# Altium PCB Flyback_PCB.PcbDoc
Units mil, origin at the board's own origin, x right, y up, seen from the top; angles counter-clockwise.
Board outline 3937.01 x 3937.01 mil, 2 copper layers (Top Layer, Bottom Layer); 52 components, 27 nets, 118 pads, 4 vias.
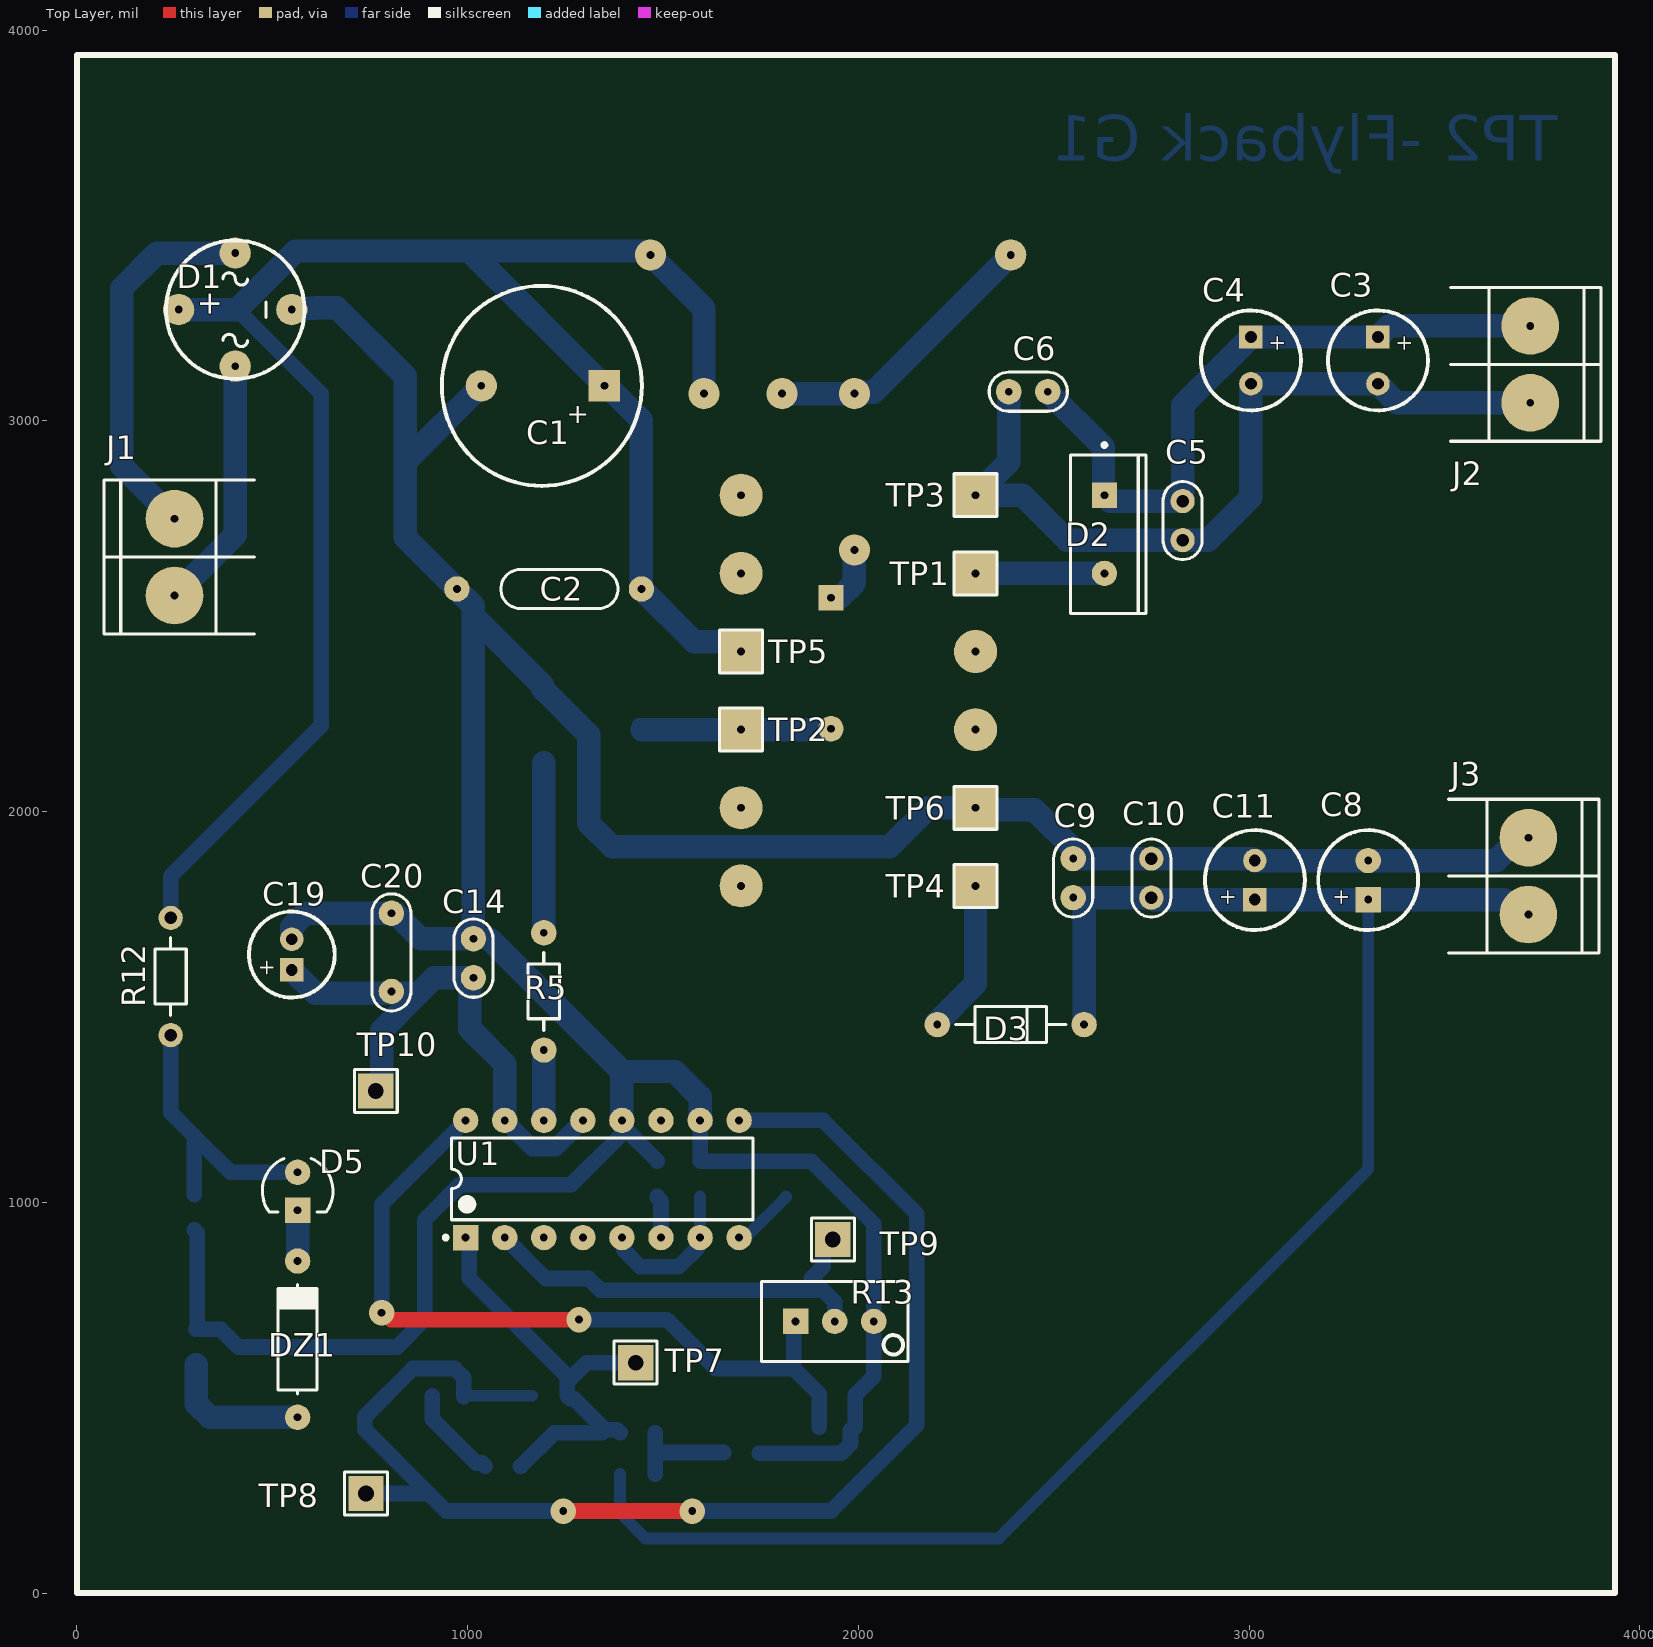
[diagram p0: Top Layer view]
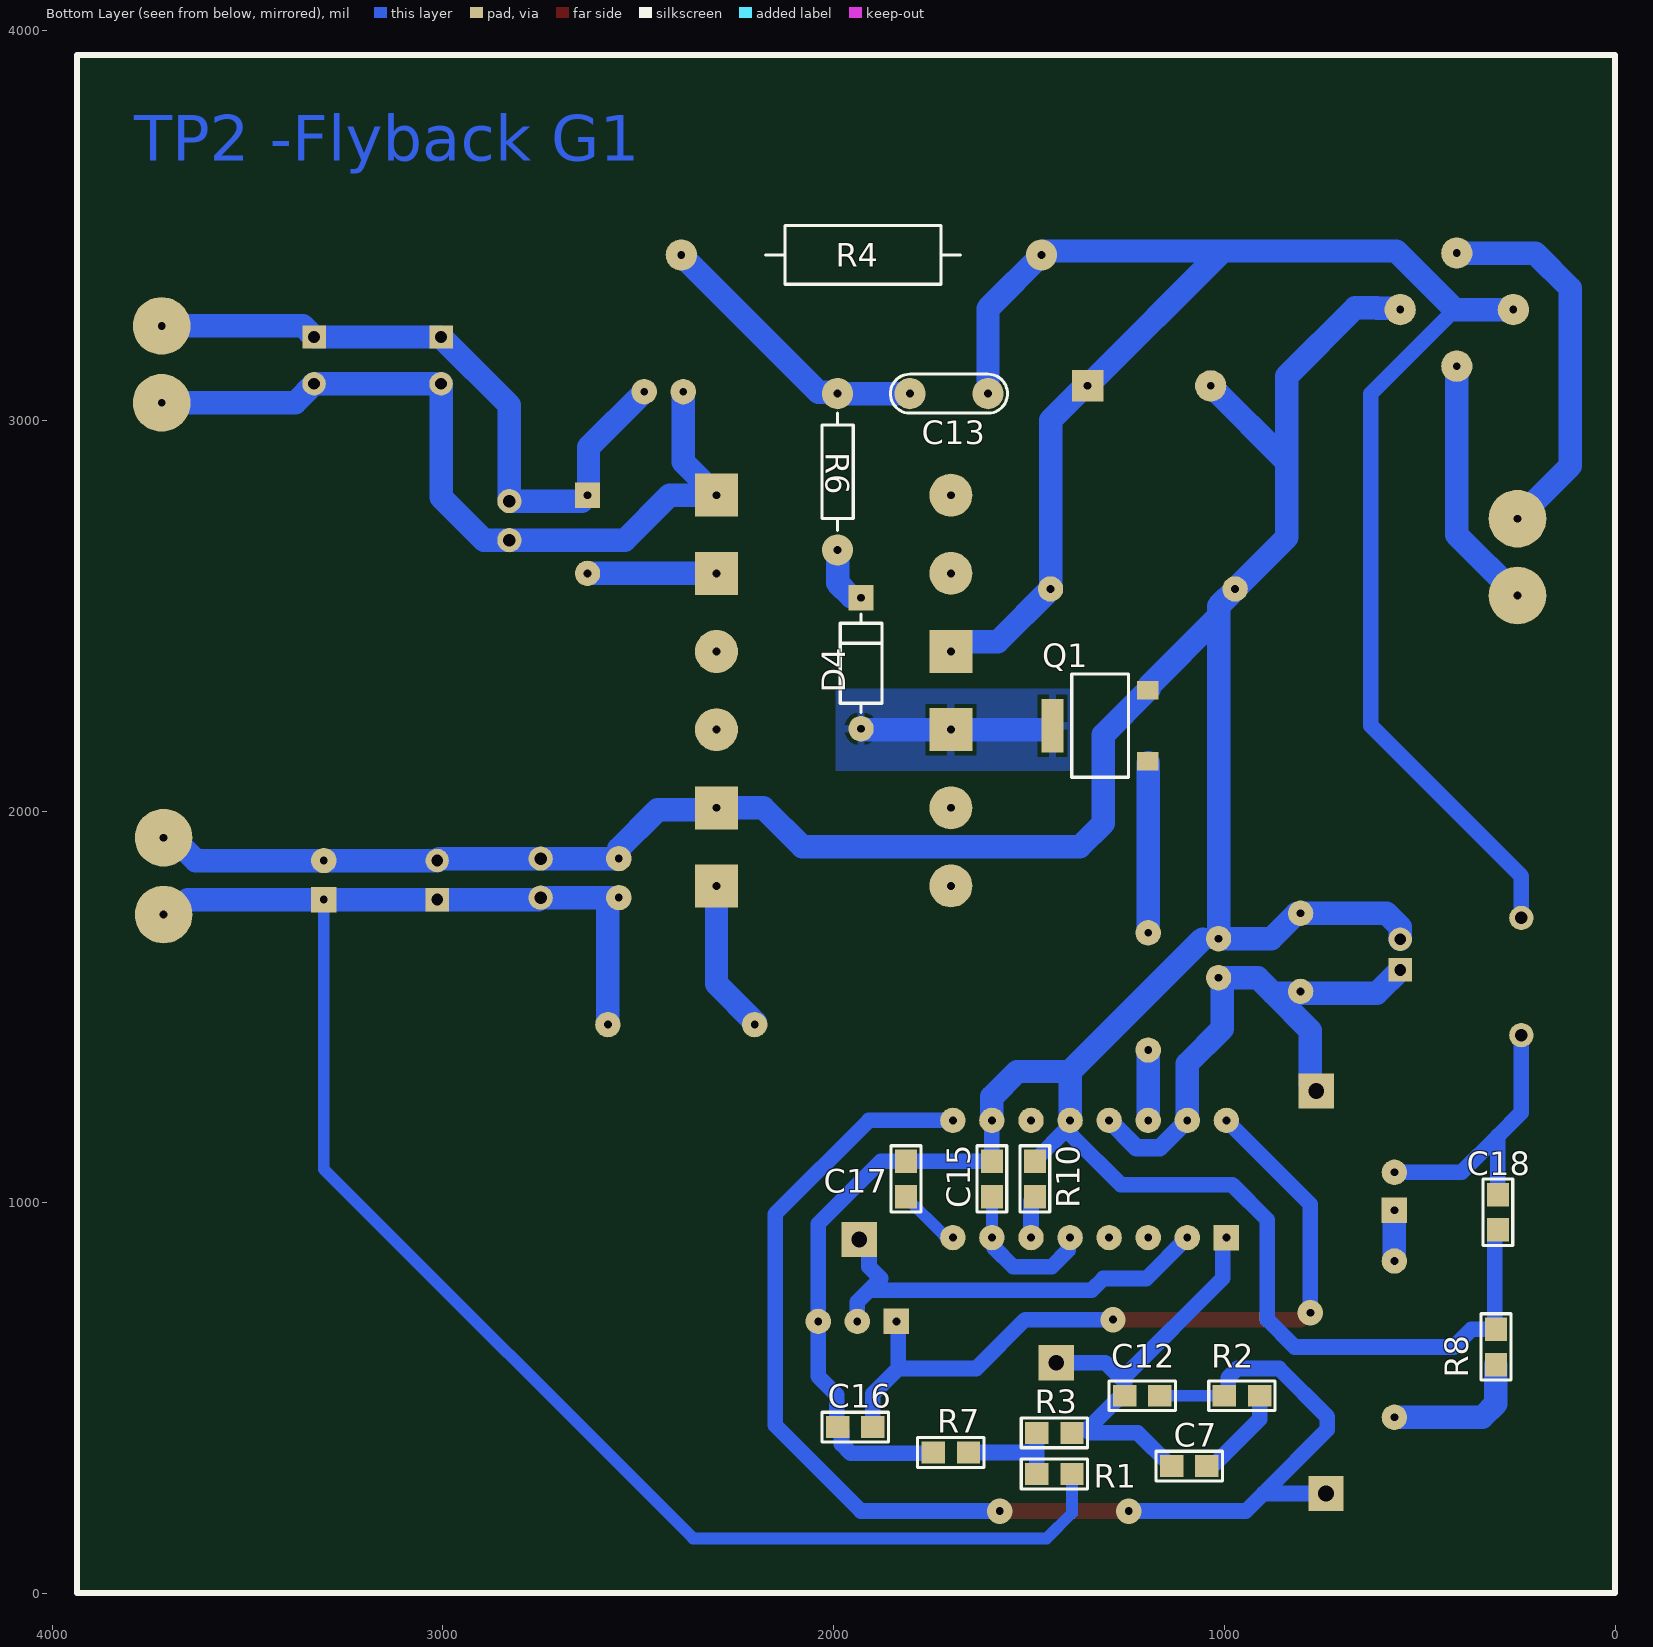
[diagram p1: Bottom Layer view, seen from below]
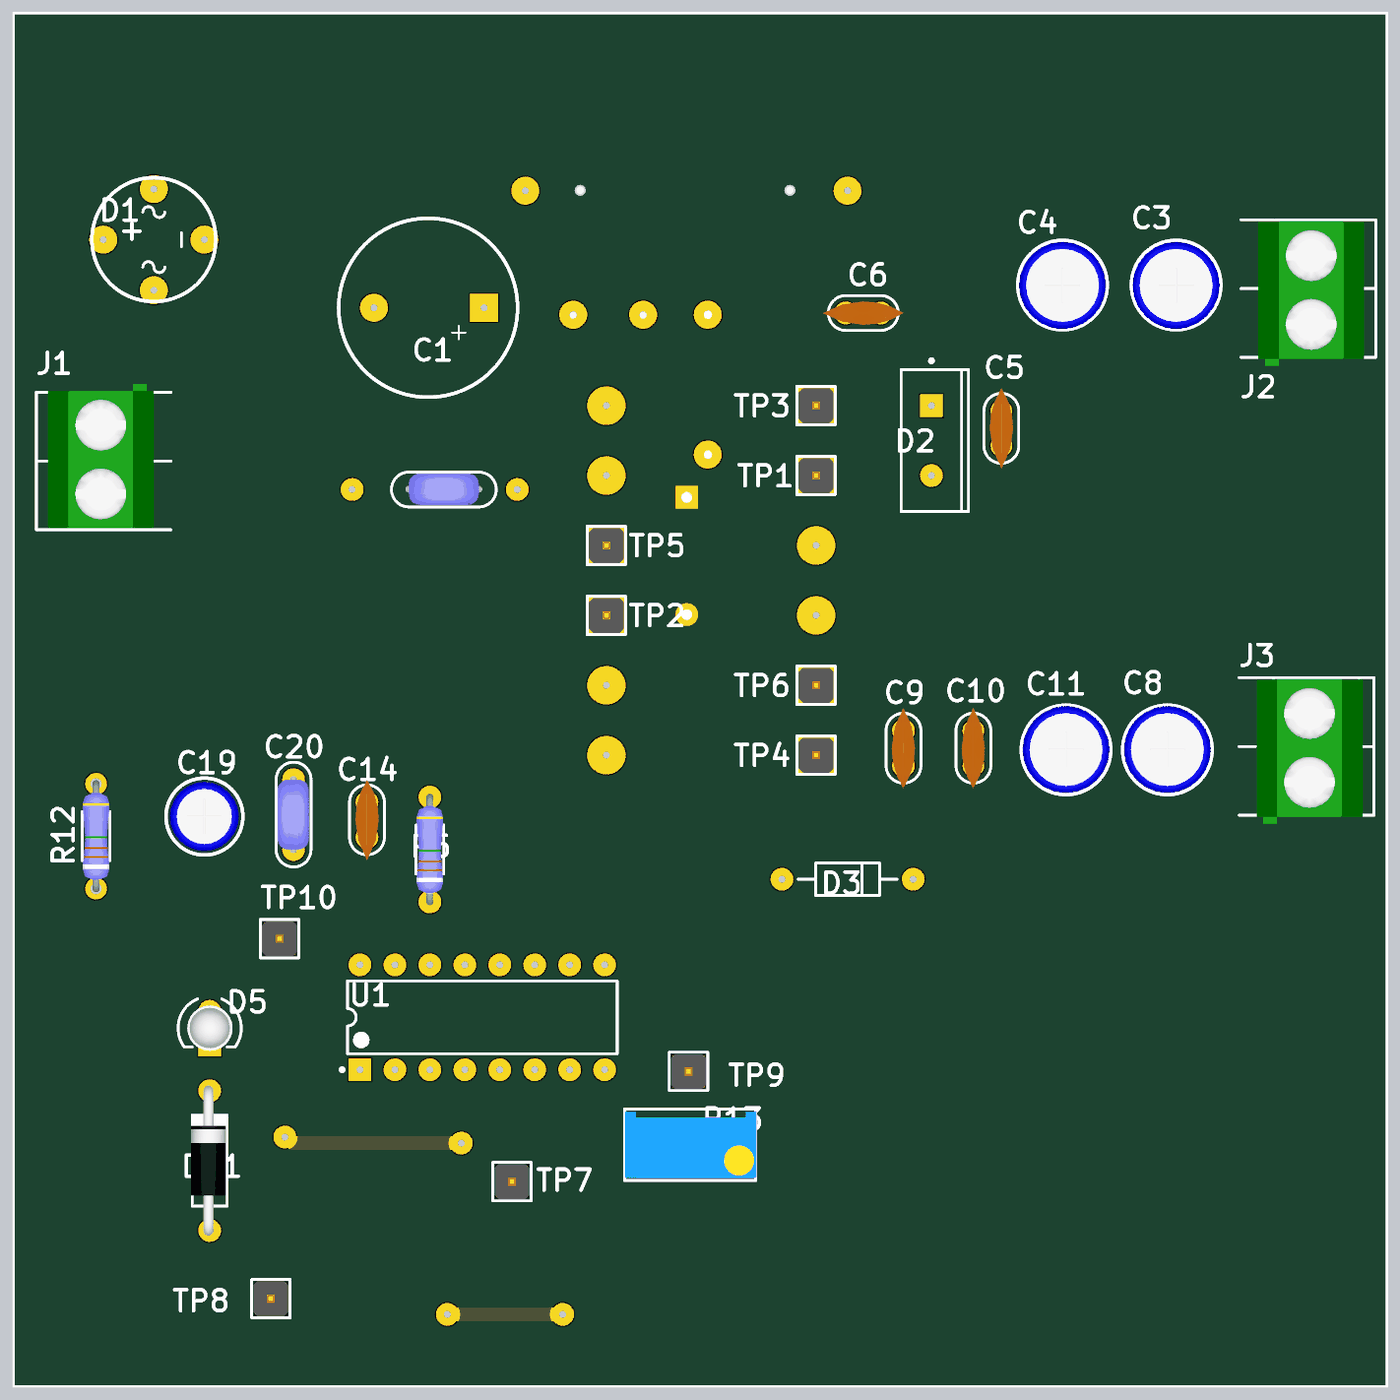
[diagram p2: 3D render of the assembled board from above, using the file's embedded part models]
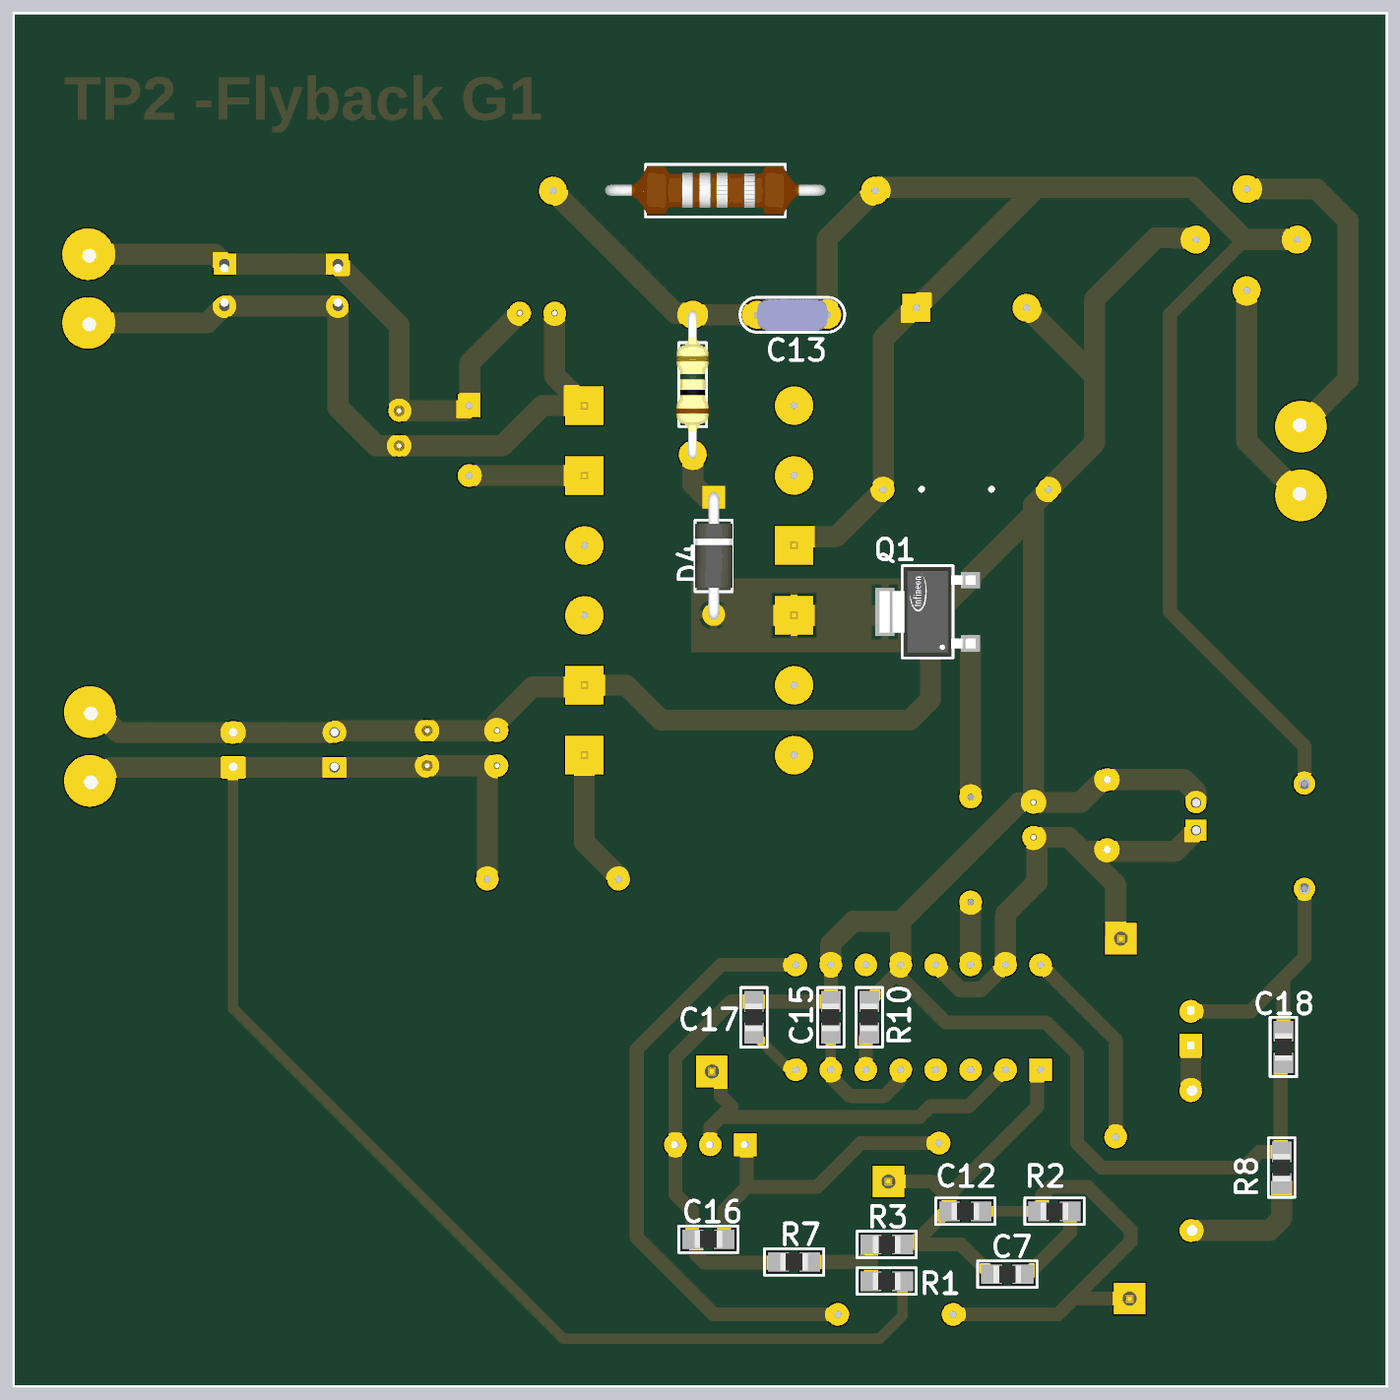
[diagram p3: 3D render of the assembled board from below, using the file's embedded part models]

## Layer stack, top to bottom
Top Solder: solder mask 0.4, Solder Resist, Dk 3.5
Top Layer: signal copper 1.4
Dielectric 1: dielectric 12.6, FR-4, Dk 4.8
Bottom Layer: signal copper 1.4
Bottom Solder: solder mask 0.4, Solder Resist, Dk 3.5

## Board outline
0,0 3937.01,0 3937.01,3937.01 0,3937.01

## Design rules (kind name [scope] priority, off if disabled: settings)
Clearance [All] p1: gap=10 ignorepadtopadclearanceinfootprint=FALSE except(0: Arc-Hole Track-Hole SMDPad-Hole THPad-Hole Via-Hole Fill-Hole Poly-Hole Region-Hole Text-Hole; 15: Arc-Fill Arc-Poly Arc-Region Track-Fill Track-Poly Track-Region SMDPad-Fill SMDPad-Poly SMDPad-Region THPad-Fill THPad-Poly THPad-Region Via-Fill Via-Poly Via-Region)
PlaneClearance [All] p1: clearance=40
PolygonConnect [All] p1: connectstyle=Relief reliefconductorwidth=20 reliefentries=4 polygonreliefangle="90 Angle" airgapwidth=10
RoutingVias [All] p1: holewidth=28 width=50 viastyle="Through Hole" minholewidth=28 minwidth=50 maxholewidth=28 maxwidth=50
SilkToSilkClearance [All] p1: silktosilkclearance=0
SilkToSolderMaskClearance [IsPad] p1: minsilkscreentomaskgap=0 clearancetoexposedcopper=TRUE
SolderMaskExpansion [All] p1: expansion=4 istentingtop=FALSE
Width [All] p1: maxlimit=60 minlimit=30 preferedwidth=40
27 further rules are at their usual default settings.

## Components (designator, comment, footprint, x,y, rotation, side; value= is the part's Value field where it differs from the comment)
C1 "47u - 400V" CAP200RP2 1190,3090 r180 top
C2 "100n - 600V" CAP200#1 1235,2570 r180 top
C3 "47u" CAP100RP2#1 3330,3155 r270 top
C4 "47u" CAP100RP2#1 3005,3155 r270 top
C5 "1u" CAP100#1 2830,2745 r270 top
C6 "100n" CAP100#2 2435,3075 r180 top
C7 "CAP" 0805 1090,325 r0 bottom
C8 "47u" CAP100RP2#2 3305,1825 r90 top
C9 "100n" CAP100#2 2550,1830 r90 top
C10 "1u" CAP100#1 2750,1830 r90 top
C11 "22u" CAP100RP2#3 3015,1825 r90 top
C12 "CAP" 0805 1210,505 r180 bottom
C13 "2.6n - 600V" CAP200#2 1705,3070 r180 bottom
C14 "100n" CAP100#2 1015,1625 r270 top
C15 "5.6n" 0805 1595,1060 r90 bottom
C16 "1n" 0805 1945,425 r180 bottom
C17 "1u" 0805 1815,1060 r90 bottom
C18 "100n" 0805 300,975 r90 bottom
C19 "10u" CAP100RP 550,1634.37 r90 top
C20 "1u" CAP200#3 805,1640 r270 top
D1 "PUENTE" "PUENTE - W10M" 260.48,3285 r90 top
D2 "MBR735" ONSC-TO-220-2-221B-04_E 2630,2710 r0 top
D3 "MUR110G" ONSC-AXIAL_LEAD-2-59-10_P 2390,1455 r180 top
D4 "1N4007E-E3/54" FP-1N4007E-E3-54-MFG 1930,2380 r270 bottom
D5 "LED" LED3 565,1029 r270 top
DZ1 "13V" DO41 565,650 r90 top
J1 "VAC" BORNERA2 250,2651.57 r0 top
J2 "BORNERA 2" BORNERA2 3720,3145 r180 top
J3 "BORNERA 2" BORNERA2 3715,1835 r180 top
Q1 "IPN80R1K4" FP-PG-SOT223-3-MFG 1317.95,2220 r0 bottom
R1 "39K" 0805 1435,305 r180 bottom
R2 "RES" 0805 955,505 r0 bottom
R3 "560" 0805 1435,410 r0 bottom
R4 "51K" RES600 2225,3425 r180 bottom
R5 "47" RES300#1 1195,1390 r90 top
R6 "120" RES400 1990,2670 r90 bottom
R7 "6.8K" 0805 1700,360 r0 bottom
R8 "1K" 0805 305,630 r90 bottom
R10 "1.2K" 0805 1485,1060 r90 bottom
R12 "100K - 2W" RES300#2 240,1428.07 r90 top
R13 "1K" "PRESET V" 1939.59,695.41 r0 top
TP1 "TP" TPTH#1 2300,2610 r0 top
TP2 "TP" TPTH#1 1700,2210 r0 top
TP3 "TP" TPTH#1 2300,2810 r0 top
TP4 "TP" TPTH#1 2300,1810 r0 top
TP5 "TP" TPTH#1 1700,2410 r0 top
TP6 "TP" TPTH#1 2300,2010 r0 top
TP7 "TP" TPTH#2 1430,590 r0 top
TP8 "TP" TPTH#2 740,255 r0 top
TP9 "TP" TPTH#2 1935,905 r0 top
TP10 "16VDC" TPTH#2 765,1285 r90 top
U1 "SG3525AN" ONSC-PDIP-16-648-08_T 1345,1060 r90 top

## Footprints (in the part's own frame and the unit in brackets; to place one, negate y for a bottom-side part, rotate by r counter-clockwise, add the part's x,y. Pads: shape width x height; smd on the part's side, far side on the other; paste and mask are expansions set on the pad)
0805 [mil] "Pasivo 0805"
  rect 60x56 smd: 1(-45,0) 2(45,0)
  silkscreen extent -85,-38 85,38, body extent -40,-24 39,25, height 15
BORNERA2 [mm] "Bornera con Tornillos 5mm separación"
  round 3.75 hole 0.508: 1(0,2.5) 2(0,-2.5)
  silkscreen extent -4.6,-5 5.2,5, body extent -3.76,-4.89 3.94,5.61, height 10
CAP100#1 [mil]
  round 62 hole 32: 1(-50,0) 2(50,0)
  silkscreen extent -100,-50 100,50, body extent -115,-33 115,34, height 241
CAP100#2 [mil]
  round 65 hole 20: 1(-50,0) 2(50,0)
  silkscreen extent -100,-50 100,50, body extent -115,-33 115,34, height 241
CAP100RP [mil] "Body diameter 5mm"
  rect 60x60 hole 30: 1(-39.37,0)
  round 60 hole 30: 2(39.37,0)
  silkscreen extent -110,-110 110,110, body extent -99,-99 99,100, height 454
CAP100RP2#1 [mil] "Body diameter 6.5mm"
  rect 60x60 hole 30: 1(-60,0)
  round 60 hole 30: 2(60,0)
  silkscreen extent -128,-128 128,128, body extent -124,-125 126,125, height 454
CAP100RP2#2 [mil] "Body diameter 6.5mm"
  rect 65x65 hole 20: 1(-50,0)
  round 65 hole 20: 2(50,0)
  silkscreen extent -128,-128 128,128, body extent -124,-125 126,125, height 454
CAP100RP2#3 [mil] "Body diameter 6.5mm"
  rect 60x60 hole 30: 1(-50,0)
  round 60 hole 30: 2(50,0)
  silkscreen extent -128,-128 128,128, body extent -124,-125 126,125, height 454
CAP200#1 [mil]
  round 65 hole 20: 1(-210,0) 2(262.44,0)
  silkscreen extent -150,-50 150,50, body extent -110,-46 110,44, height 246
CAP200#2 [mil]
  round 80 hole 20: 1(-100,0) 2(100,0)
  silkscreen extent -150,-50 150,50, body extent -110,-46 110,44, height 246
CAP200#3 [mil]
  round 65 hole 20: 1(-100,0) 2(100,0)
  silkscreen extent -150,-50 150,50, body extent -110,-46 110,44, height 246
CAP200RP2 [mil] "Body Diameter 12.5mm"
  rect 80x80 hole 20: 1(-160,0)
  round 80 hole 20: 2(154.96,0)
  silkscreen extent -256,-256 256,256, body extent -246,-245 244,246, height 787
DO41 [mil]
  round 65 hole 20: 1(-200,0) 2(200,0)
  silkscreen extent -140,-50 140,50, body extent -215,-47 215,54, height 80
FP-1N4007E-E3-54-MFG [mil]
  rect 65x65 hole 20 paste-99999 mask+0: 1(-167.72,0)
  round 65 hole 20 paste-99999 mask+0: 2(167.72,0)
  silkscreen extent -125,-53 125,53, body extent -183,-53 183,53, height 106
FP-PG-SOT223-3-MFG [mm]
  rect 1.4x1.2 smd paste+0 mask+0: 1(-3.1,2.3) 3(-3.1,-2.3)
  rect 1.4x3.5 smd paste+0 mask+0: 2(3.1,0)
  silkscreen extent -1.85,-3.35 1.85,3.35, body extent -3.5,-3.25 3.5,3.25, height 1.8
LED3 [mil]
  round 65 hole 20: 1(-48,0)
  rect 65x65 hole 20: 2(49,0)
  silkscreen extent -84,-90 54,90, body extent -65,-64 65,65, height 19
ONSC-AXIAL_LEAD-2-59-10_P [mil] "AXIAL, 2-Leads, Diameter 2.35mm"
  round 65 hole 20: 1(-187.8,0) 2(187.8,0)
  silkscreen extent -142,-46 142,46
ONSC-PDIP-16-648-08_T [mil] "DIP, 16-Leads, Body 19.55x6.85mm, Pitch 2.54mm"
  rect 65x65 hole 20: 1(-150,350)
  round 65 hole 20: 2(-150,250) 3(-150,150) 4(-150,50) 5(-150,-50) 6(-150,-150) 7(-150,-250) 8(-150,-350) 9(150,-350) 10(150,-250) 11(150,-150) 12(150,-50) 13(150,50) 14(150,150) 15(150,250) 16(150,350)
  silkscreen extent -155,-386 104,406, body extent -155,-385 155,385, height 175
ONSC-TO-220-2-221B-04_E [mil] "FM, 2-Leads, Body 10.3x4.85mm, Pitch 5.08mm"
  rect 65x65 hole 20: 1(0,100)
  round 65 hole 20: 3(0,-100)
  silkscreen extent -87,-203 106,233, body extent -86,-203 105,203, height 750
"PRESET V" [mil]
  rect 65x65 hole 20: 1(-100,0)
  round 65 hole 20: 2(0,0) 3(100,0)
  silkscreen extent -188,-102 188,102, body extent -185,-95 190,95, height 455
"PUENTE - W10M" [mil]
  round 80 hole 20: 1(0,0) 2(-144.76,-144.76) 3(0,-289.52) 4(144.76,-144.76)
  silkscreen extent -177,-322 177,32
RES300#1 [mil]
  round 65 hole 20: 1(0,0) 2(300,0)
  silkscreen extent 50,-40 250,40, body extent -10,-38 310,38, height 79
RES300#2 [mil]
  round 62 hole 32: 1(0,0) 2(300,0)
  silkscreen extent 50,-40 250,40, body extent -10,-38 310,38, height 79
RES400 [mil]
  round 80 hole 20: 1(0,0) 2(400,0)
  silkscreen extent 50,-40 350,40, body extent -12,-45 412,46, height 95
RES600 [mil]
  round 80 hole 20: 1(-165,0) 2(757.05,0)
  silkscreen extent 50,-75 550,75, body extent -16,-68 616,70, height 141
TPTH#1 [mil]
  rect 110x110 hole 20: 1(0,0)
  silkscreen extent -55,-55 55,55, body extent -50,-50 50,50, height 238
TPTH#2 [mil]
  rect 90.55x90.55 hole 40: 1(0,0)
  silkscreen extent -55,-55 55,55, body extent -50,-50 50,50, height 238

## Part data
C1 C4 C8 C11 C19: library part CAPPOL
C2 C15 C16 C17 C18: library part CAP
C3: library part CAPPOL, "Cerámico multicapa"
C5 C6 C9 C10: library part CAP, "Cerámico multicapa"
C13: library part CAP, "Tantalio"
C14 C20: library part CAP, "-10u Electronlitico - 1u Multicapa - 0.1u ceramico"
D2: library part CMP-1055-00595-1, "SWITCHMODE(TM) Power Rectifier, 2-Pin TO-220, Tube", Manufacturer="On Semiconductor", ComponentLink1Description="Manufacturer URL", ComponentLink1URL=http://www.onsemi.com/, ComponentLink2Description=Datasheet, ComponentLink2URL=http://www.onsemi.cn/pub_link/Collateral/MBR735-D.PDF, ComponentLink3Description="Package Specification", ComponentLink3URL=http://www.onsemi.com/pub_link/Collateral/BYW29-D.PDF, Configuration=Single, DatasheetVersion="Rev. 8", IFSM Max (A)=150, Mounting Technology="Through Hole", PackageDescription="2-Pin Flange Mount, Vertical Straight Lead, Body 9.97 x 4.44 mm, Pitch 5.08 mm", PackageReference=TO-220-2-221B-04_E, PackageVersion="Rev. E", Packing=Tube, PartNumber=MBR735, RoHS=FALSE
D3: library part CMP-0902-00129-1, "SWITCHMODE(TM) Power Rectifier, 2-Pin Axial_Lead, Pb-Free, Bulk Bag", Manufacturer="On Semiconductor", PartNumber=MUR160G, ComponentLink1Description="Manufacturer URL", ComponentLink1URL=http://www.onsemi.com/, ComponentLink2Description=Datasheet, ComponentLink2URL=http://www.onsemi.com/pub_link/Collateral/MUR120-D.PDF, ComponentLink3Description="Package Specification", ComponentLink3URL=http://www.onsemi.cn/pub_link/Collateral/59-10.PDF, DatasheetVersion="Rev. 12", IFSM Max (A)=35, Mounting Technology="Through Hole", PackageDescription="2-Pin, Axial Lead, Diameter 2.35 mm", PackageReference=AXIAL_LEAD-2-59-10, PackageVersion="Rev. U, 02/2005", Packing="Bulk Bag", RoHS=TRUE, Type=Ultrafast, VRRM Max (V)=600
D4: library part CMP-02540-000087-1, "DIODE GEN PURP 1KV 1A DO204AL", Average Rectified Current=1A, Case/Package=DO-41, Forward Voltage=1.1V, Max Operating Temperature=150°C, Max Repetitive Reverse Voltage (Vrrm)=1kV, Max Reverse Current=5uA, Max Surge Current=45A, Min Operating Temperature=-50°C, Package Quantity=5500, Contact Plating=Tin, Element Configuration=Single, Max Reverse Voltage (DC)=1kV, Mount="Through Hole", Number of Pins=2, Packaging="Tape and Reel", Peak Non-Repetitive Surge Current=45A, Radiation Hardening=No, Reverse Voltage=1kV, RoHS Compliant=Yes, Series=-
DZ1: library part "DIODO ZENER"
J1: library part "BORNERA 2"
Q1: library part CMP-00196-84309566-1, "IPN80R1K4P7ATMA1 Power Transistor MOSFET N-Channel Enhancement 800V 4A 3-Pin SOT-223", Continuous Drain Current (ID)=4A, Drain to Source Breakdown Voltage=800V, Drain to Source Resistance=1.2Ω, Gate to Source Voltage (Vgs)=20V, Max Junction Temperature (Tj)=150°C, Min Operating Temperature=-55°C, On-State Resistance=1.4Ω, Package Quantity=3000, Power Dissipation=7W, Drain to Source Voltage (Vdss)=800V, Height=1.8mm, Lifecycle Status=Production, Max Operating Temperature=150°C, NexarPartId=84309566, Number of Channels=1, Packaging="Tape & Reel", RoHS=Non-Compliant, Schedule B="8541290080, 8541290080", Turn-Off Delay Time=40ns, Turn-On Delay Time=10ns
R1 R3 R4 R5 R6 R7 R8 R10 R12: library part RES
R13: library part PRESET
TP10: library part TP
U1: library part CMP-2000-07049-1, "Pulse Width Modulator Control Circuit, 8 to 35 V, 0 to 70 degC, 16-Pin PDIP, RoHS, Tube", Frequency - Max=400kHz, Manufacturer="ON Semiconductor", Operating Temperature=0°C~70°C, Package / Case="16-DIP(0.300\",7.62mm)", Package Description="16-Pin Plastic Dual-In Line Package, Body 19.175 x 6.6 mm, Pitch 2.54 mm", Package Reference=PDIP-16-648-08_T, Standard Package=25, Voltage - Supply=8V~35V, Boost=No, Buck=No, Category=IntegratedCircuits(ICs), Cuk=No, Datasheet URL=http://www.onsemi.cn/pub_link/Collateral/SG3525A-D.PDF, Datasheet Version="Rev. 5, 01/2005", Divider=No, Doubler=No, Duty Cycle=49%, Family=PMIC-VoltageRegulators-DCDCSwitchingControllers, Flyback=No, Inverting=No, Isolated=No, Manufacturer URL=http://www.onsemi.com/, Mounting Technology=ThroughHole, Number of Outputs=2, Other Names=SG3525ANOS, Packaging=Tube, Product Change Notification=ProductDiscontinuation27/Jun/2007, PWM Type=VoltageMode

## Free pads (board coordinates)
  round 110 hole 20: 1(1700,1810) 4(1700,2010) 6(1700,2610) 9(1700,2810) 12(2300,2210) 14(2300,2410)

## Via types
v1: diameter 65, hole 20, Top Layer to Bottom Layer, 4 vias

## Nets (pads, with @x,y where several pads share a name; then routed paths per layer and width w, separated by ;. In a path a pad name is that pad's centre, name@x,y a point inside that pad or via, vN(x,y) a via of type N, cw(c..) or ccw(c..) an arc to the next point about the centre after c; other vN are vias at no path point)
GND: C1.2 C2.2 C8.2 C9.2 C10.2 C11.2 C14.1 C15.2 C16.1 C17.2 C18.1 C19.2 C20.1 D1.3 J3.2 Q1.3 R7.2 R8.2 R10.2 R13.3 TP6.1 U1.10 U1.12 | length 10083.3
  Bottom Layer w40: C18.1 308,922 R8.2@308,692.19 ; R8.2 368,675 413,630 820,630 890,700 890,955 980,1045 1265,1045 1390.22,1170.22 ; U1.12 1399.78,1205.22 1399.78,1192.22 1485,1107 R10.2 ; U1.10 C15.2 C17.2 1880,1105 2040,945 2040,555 1992,507 C16.1@1992,425 ; R7.2@1746.87,358.13 1956.57,358.13 1980,381.56 C16.1@1980,417
  Bottom Layer w60: C19.2 550,1704.85 585.15,1740 C20.1 805.96,1739.04 815.96,1739.04 880,1675 C14.1 1015,2526.21 972.56,2568.65 C2.2 840,2702.56 840,2894.96 ; D1.3 553.83,3288.83 608.83,3288.83 610,3290 665,3290 840,3115 840,2894.96 ; 1019.27,2495.73 1191.97,2323.03 Q1.3@1191.97,2314.49 ; C1.2 840,2894.96 ; 1055.96,1674.04 1395,1335 ; Q1.3 1310,2196.46 1310,1970 1370,1910 2080,1910 2180,2010 TP6.1 2320,2010 2325,2005 2450,2005 2454.65,2000.35 2550,1905 C9.2@2550,1880.15 ; U1.12 1395,1335 ; U1.10 1595,1270 1530,1335 1395,1335 ; C9.2@2550,1880.1 C9.2 C10.2 3010,1880 C11.2 C8.2 3632.86,1875 3691.29,1933.43 J3.2
GND-2: C3.2 C4.2 C5.2 C6.2 J2.1 TP3.1 | length 2122.6
  Bottom Layer w60: C6.2@2385,3074.12 2385,2895 TP3.1 2420,2810 2535,2695 2895,2695 3005,2805 C4.2 C3.2 3378.43,3046.57 J2.1
NetC7_1: C7.1 R2.1 | length 244.7
  Bottom Layer w40: R2.1 910,445 1022,333 1037,333 C7.1
NetC13_1: C13.1 R4.1 R6.2 | length 746.7
  Bottom Layer w60: C13.1@1795.76,3070 R6.2 1993.83,3073.83 2038.83,3073.83 R4.1@2393.83,3428.83
NetC14_2: C14.2 C19.1 C20.2 TP10.1 U1.13 U1.15 | length 1468.6
  Bottom Layer w45: U1.15 1165,1140 1225,1140 U1.13
  Bottom Layer w60: C19.1 610,1535 798.65,1535 802.69,1539.04 803.65,1539.04 C20.2@805,1537.69 ; TP10.1 780,1300 780,1440 875,1535 ; C20.2@805,1535 875,1535 ; U1.15 1095,1355 1005,1445 1005,1563.65 1015,1573.65 C14.2 915,1575 875,1535
NetC15_1: C15.1 U1.5 U1.7 | length 394.9
  Bottom Layer w30: U1.7 C15.1
  Bottom Layer w40: U1.5 1399.78,905.22 1399.78,877.89 1442.68,835 1540,835 1590.22,885.22 1590.22,905.22 U1.7
NetC16_2: C16.2 R13.1 U1.16 | length 1994.6
  Top Layer w40: v1(780,717.5) 786.76,717.5 804.26,700 v1(1285,700)
  Bottom Layer w40: v1(780,717.5) 780,995 U1.16 ; v1(1285,700) 1510,700 1635,575 1835,575 ; R13.1@1840,695 1835,690 1835,575 ; C16.2 1900,510 1835,575
NetC17_1: C17.1 U1.8 | length 168.2
  Bottom Layer w30: U1.8 1700.56,915.56 1717.56,915.56 1815,1013 C17.1
  Bottom Layer w40: U1.8@1692.5,912.5 U1.8
NetD1_2: D1.2 J1.2 | length 651.4
  Bottom Layer w60: J1.2 405.24,2708.39 D1.2
NetD1_4: D1.4 J1.1 | length 973.3
  Bottom Layer w60: J1.1 115,2885 115,3340 204.76,3429.76 D1.4
NetD4_1: D4.1 R6.1 | length 159.7
  Bottom Layer w60: D4.1 1932.5,2550.22 1954.85,2550.22 1990,2585.36 R6.1@1990,2669.46
NetD5_2: D5.2 DZ1.2 | length 130
  Bottom Layer w60: DZ1.2 D5.2
NetDZ1_1: DZ1.1 R8.1 | length 374.4
  Bottom Layer w60: R8.1 305,485.15 340.15,450 DZ1.1
NetQ1_1: Q1.1 R5.2 | length 436
  Bottom Layer w60: R5.2 1195,2125.37 Q1.1@1195.45,2125.83
NetR1_1: R1.1 R3.2 R7.1 | length 280
  Bottom Layer w40: R1.1 1480,360 ; R3.2 1480,360 ; R7.1 1480,360
NetR10_1: R10.1 U1.6 | length 109.1
  Bottom Layer w40: R10.1 1485,1013 1495,1003 U1.6
NetR13_2: R13.2 TP9.1 U1.2 | length 1128.3
  Bottom Layer w40: U1.2 1199.62,805.38 1309.62,805.38 1340,775 1910,775 ; TP9.1 1909.72,879.72 1909.72,835.48 1879.62,805.38 1910,775 ; R13.2 1939.59,745.41 1910,775
Vcomp: C12.2 R2.2 TP8.1 U1.9 | length 3406.3
  Top Layer w40: v1(1245,210) v1(1575,210)
  Bottom Layer w30: R2.2 C12.2
  Bottom Layer w40: TP8.1 900,255 ; R2.2@990,503 990,551.57 966.57,575 860,575 736.57,451.57 736.57,418.43 900,255 ; v1(1245,210) 945,210 900,255 ; v1(1575,210) 1930,210 2150,430 2150,970 1910,1210 U1.9
Vcontrol: R5.1 U1.14 | length 180
  Bottom Layer w60: U1.14 R5.1
Vdrain: D4.2 Q1.2 TP2.1 | length 496.5
  Bottom Layer w40: Q1.2 1440,2217.56 Q1.2@1447.56,2210
  Bottom Layer w60: Q1.2@1447.56,2210 TP2.1 1927.72,2210 D4.2
Vfb: C7.2 C12.1 R3.1 TP7.1 U1.1 | length 1135
  Bottom Layer w40: U1.1 1004.53,900.47 1004.53,805.47 1255,555 C12.1 1263,497 1273,497 1352,418 ; C7.2 1137,325 1222,410 1344,410 ; 1255,540 1305,590 TP7.1 ; 1344,418 1382,418 R3.1
VL1: C1.1 C2.1 C13.2 D1.1 R4.2 R12.2 TP5.1 | length 4860.6
  Bottom Layer w40: R12.2 240,1835.15 625,2220.15 625,3070 410,3285
  Bottom Layer w60: D1.1 410,3285 560,3435 1005,3435 ; C1.1 1005,3435 ; C1.1@1353.43,3093.43 1353.43,3086.57 1360,3080 1366.85,3080 1445,3001.85 C2.1 1580,2435 1675,2435 TP5.1 ; R4.2@1457.95,3435 1005,3435 ; R4.2@1461.42,3431.53 1605,3287.95 C13.2
VL2: D2.3 TP1.1 | length 330
  Bottom Layer w60: TP1.1 D2.3
VL3: D3.2 TP4.1 | length 390.2
  Bottom Layer w60: D3.2@2201.14,1460.71 2300,1559.57 TP4.1
Vled: C18.2 D5.1 R12.1 | length 736.4
  Bottom Layer w40: R12.1 240,1230 300,1170 ; C18.2 300,1170 ; D5.1 393,1077 300,1170
Vo1: C3.1 C4.1 C5.1 C6.1 D2.1 J2.2 | length 1750.5
  Bottom Layer w60: C6.1 2627.5,2932.5 2627.5,2812.5 D2.1 2645,2795 C5.1 2830,3040 C4.1 C3.1 3358.43,3243.43 J2.2
Vo2: C8.1 C9.1 C10.1 C11.1 D3.1 J3.1 R1.2 | length 4602.2
  Bottom Layer w30: R1.2 1390,205 1455,140 2360,140 3305,1085 C8.1
  Bottom Layer w60: C9.1 2577.8,1780 2750.54,1780 2755.54,1775 C8.1 3652.86,1775 3691.29,1736.57 J3.1 ; D3.1 2577.8,1750.85
pads on no net: U1.3 U1.4 U1.11

## Polygon pours and split planes (outlines as drawn)
Vdrain on Bottom Layer "VDRAIN_L02_P000" (solid, pour order 0): 1390,2315 1427.5,2315 1995,2315 1995,2105 1390,2105 1390,2330

## Other copper
Bottom Layer:
  text "TP2 -Flyback G1" at 3790,3627.76 h200

## Silkscreen, mask and mechanical layers (free items; w line width, h text height)
Top Overlay:
  the board outline again, w15
Bottom Overlay:
  the board outline again, w15

## Text inside footprints (layer, text, board x,y; h text height)
C1: Top Overlay "+" at 1312,3038 h50 r180
C3: Top Overlay "+" at 3381,3222 h40 r270
C4: Top Overlay "+" at 3056,3222 h40 r270
C8: Top Overlay "+" at 3254,1758 h40 r90
C11: Top Overlay "+" at 2964,1758 h40 r90
C19: Top Overlay "+" at 504,1577.37 h40 r90
D1: Top Overlay "+" at 365.87,3265.32 h60 r90